# Altium PCB buoys_pcb_v2.PcbDoc
Units mm, origin at the board's own origin, x right, y up, seen from the top; angles counter-clockwise.
Board outline 65.02 x 44.32 mm, 2 copper layers (Top Layer, Bottom Layer); 41 components, 21 nets, 102 pads, 25 vias.
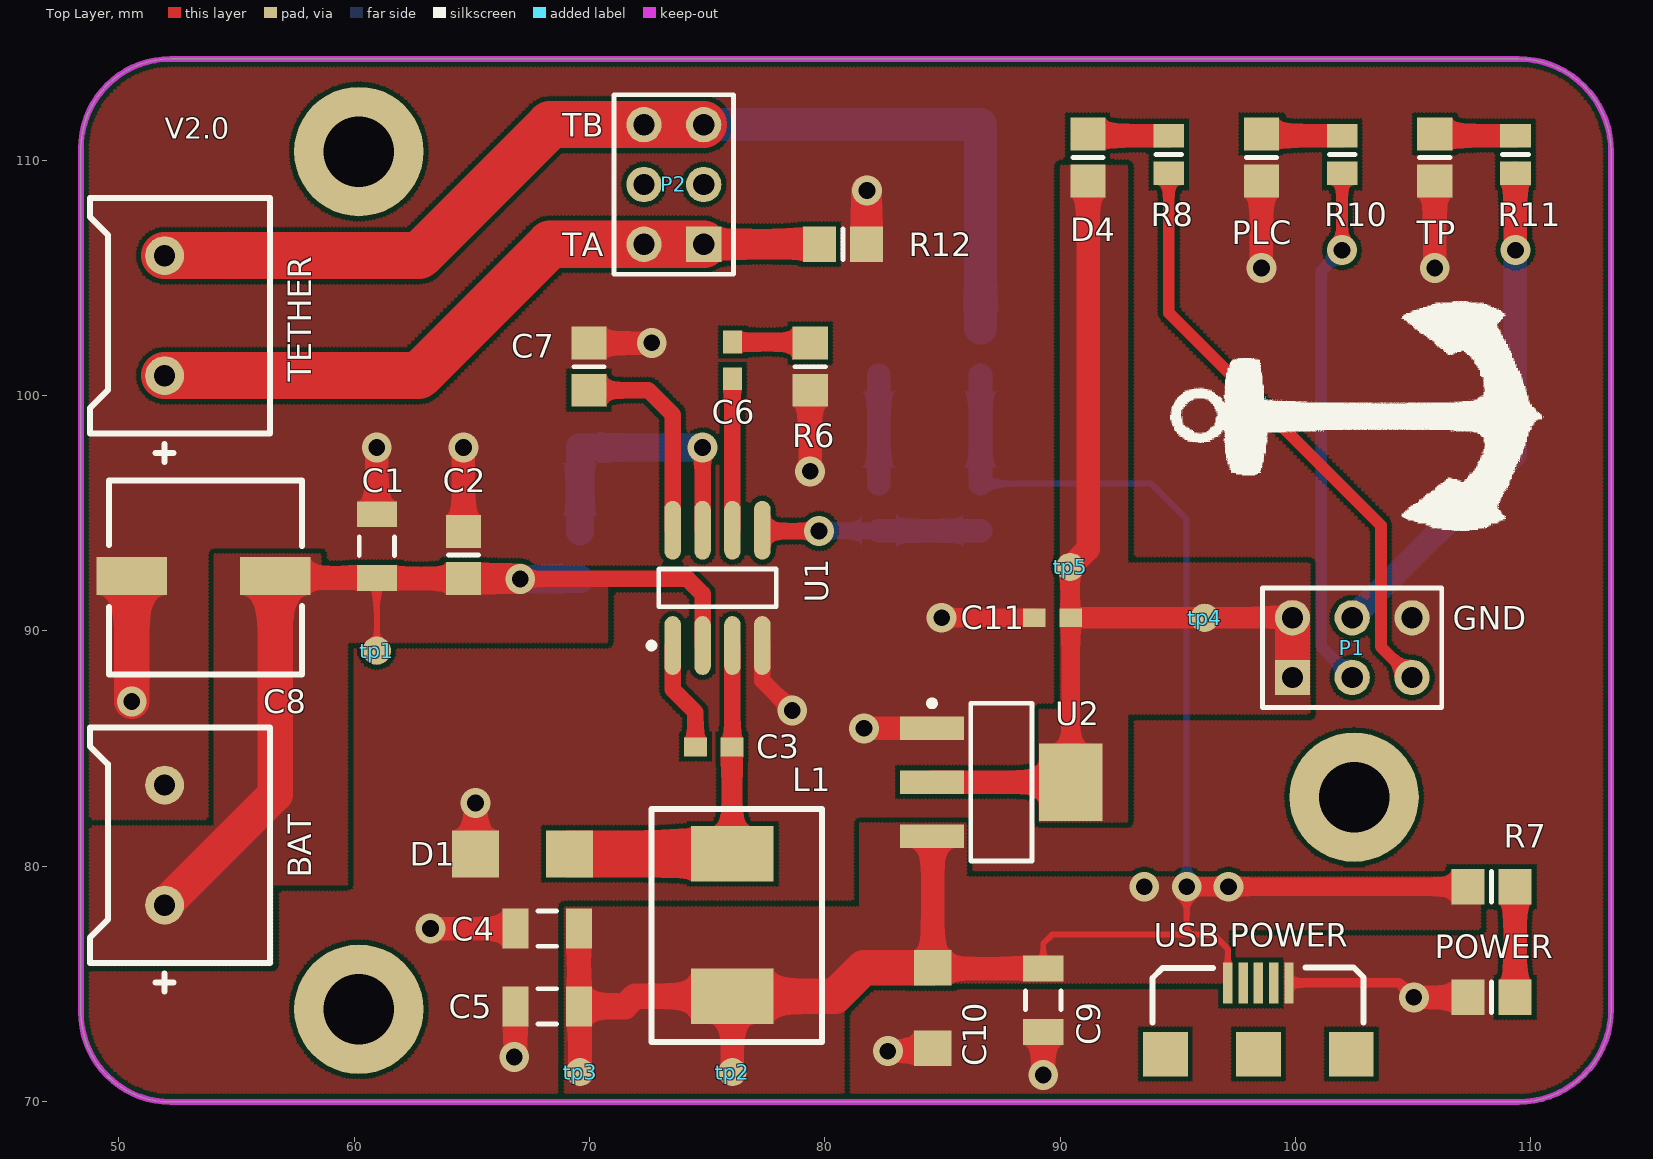
[diagram p0: Top Layer view]
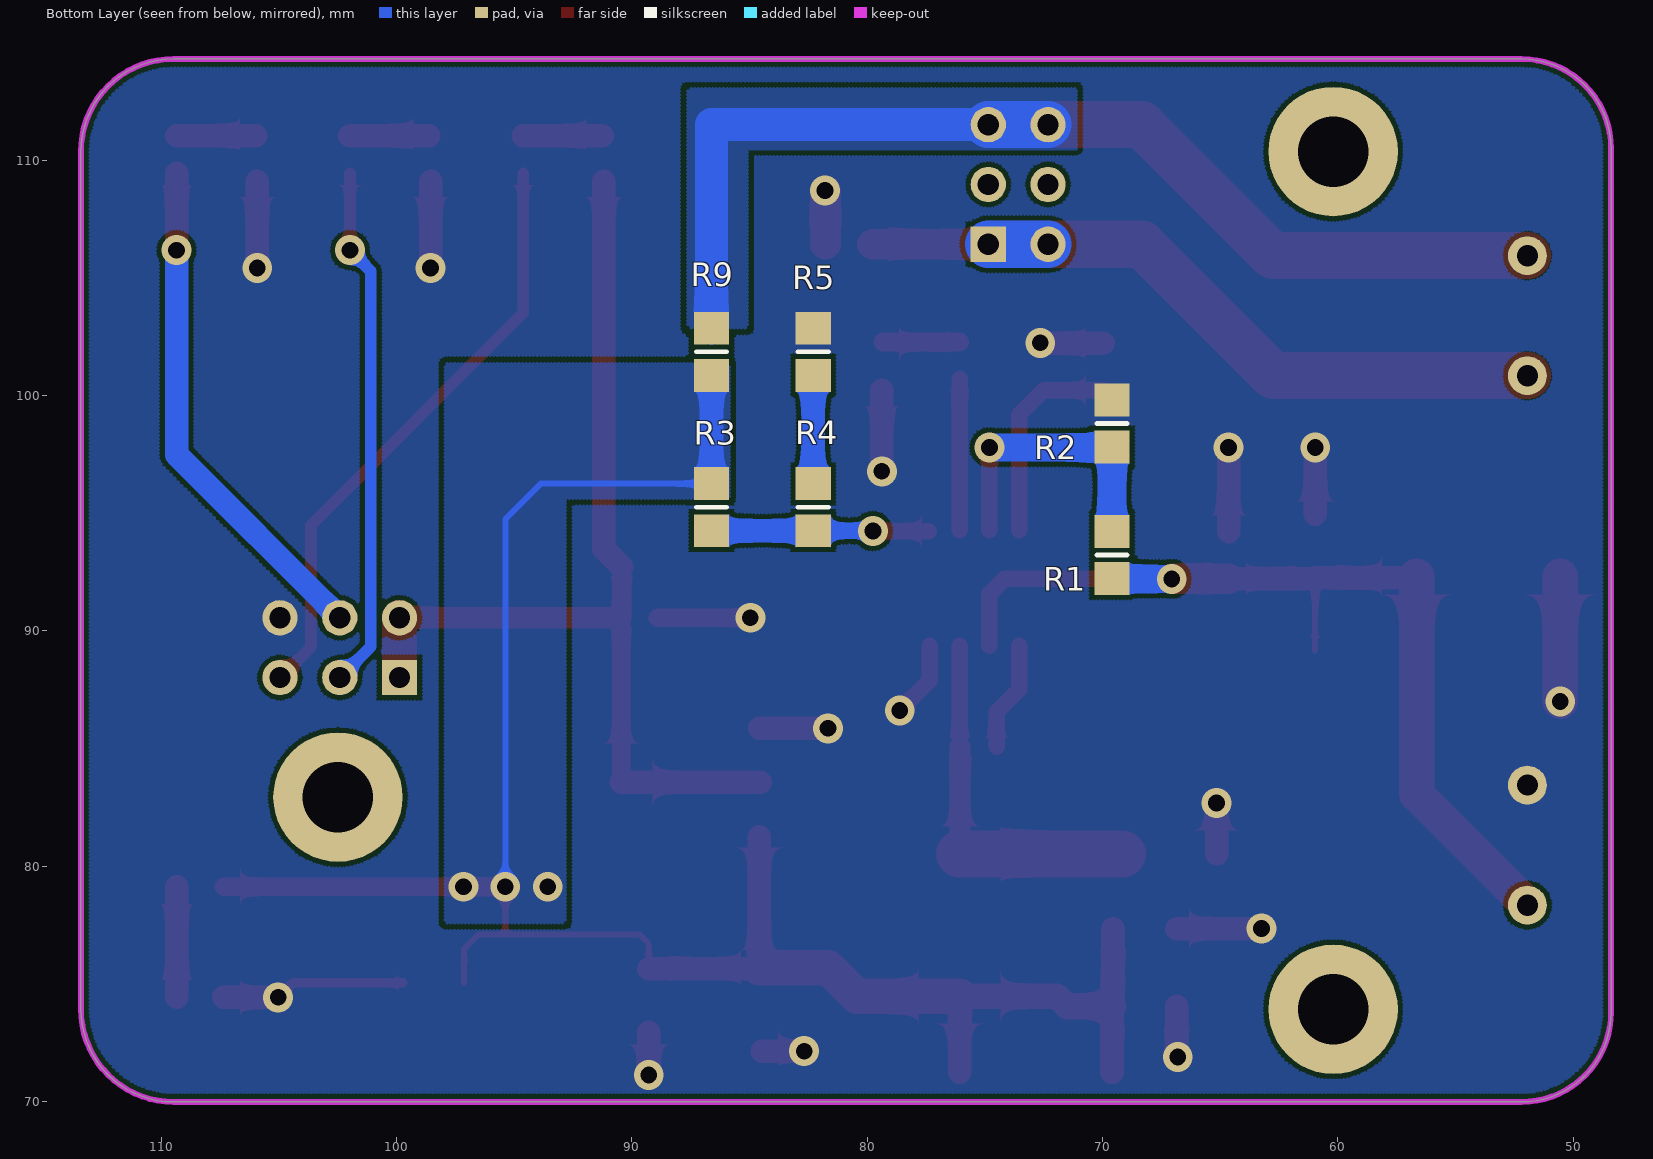
[diagram p1: Bottom Layer view, seen from below]

## Layer stack, top to bottom
Top Solder: solder mask 0.0102, Solder Resist, Dk 3.5
Top Layer: signal copper 0.0356
Dielectric 1: dielectric 0.32, FR-4, Dk 4.8
Bottom Layer: signal copper 0.0356
Bottom Solder: solder mask 0.0102, Solder Resist, Dk 3.5

## Board outline
48.387,73.787 48.387,110.49 cw(c52.197,110.49) 52.197,114.3 109.474,114.3 cw(c109.474,110.363) 113.411,110.363 113.411,73.914 cw(c109.474,73.914) 109.474,69.977 52.197,69.977 cw(c52.197,73.787)

## Design rules (kind name [scope] priority, off if disabled: settings)
Clearance [All] p1: gap=0.2
PolygonConnect [All] p1: connectstyle=Direct reliefconductorwidth=0.254 reliefentries=4 polygonreliefangle="90 Angle" airgapwidth=0.254
RoutingVias [All] p1: holewidth=0.711 width=1.27 viastyle="Through Hole" minholewidth=0.711 minwidth=1.27 maxholewidth=0.711 maxwidth=1.27
SolderMaskExpansion [All] p1: expansion=0.102
Width [All] p1: maxlimit=2 minlimit=0.254 preferedwidth=0.254
30 further rules are at their usual default settings.

## Components (designator, comment, footprint, x,y, rotation, side; value= is the part's Value field where it differs from the comment)
BAT "Header 2" ConnectorBlue 51.943,83.439 r270 top locked
C1 "Cap" C1206 60.96,93.599 r270 top
C2 "Cap" 6-0805_M 64.643,93.218 r270 top
C3 "Cap" 0603 75.946,84.963 r180 top
C4 "Cap" C1206 68.203,77.343 r0 top
C5 "Cap" C1206 68.203,74.041 r0 top
C6 "Cap" 0603 76.173,102.156 r270 top
C7 "Cap" 6-0805_M 69.977,101.219 r270 top
C8 "Cap Pol1" 220UF-35V 56.642,92.329 r180 top locked
C9 "Cap Pol2" C1206 89.281,74.295 r270 top
C10 "Cap Pol2" 1206 84.612,75.733 r270 top
C11 "Cap Pol2" 0603 90.345,90.451 r180 top
D1 "1n5824" 1n5824_1 65.151,80.518 r0 top
D4 "ORANGE" 6-0805_M 91.186,110.109 r90 top
L1 "Inductor" 0630 76.073,80.518 r270 top
P1 "Header 3X2" HDR2X3 99.871,88.011 r0 top locked
P2 "Header 3X2" HDR2X3 74.852,106.424 r90 top locked
PLC "RED" 6-0805_M 98.552,110.109 r270 top
POWER "RED POWER" 6-0805_M 108.331,74.422 r180 top
R1 "Res2" 6-0805_M 69.596,93.218 r270 bottom
R2 "Res2" 6-0805_M 69.596,98.806 r270 bottom
R3 "Res2" 6-0805_M 86.614,95.25 r270 bottom
R4 "Res2" 6-0805_M 82.296,95.25 r270 bottom
R5 "Res2" 6-0805_M 82.296,101.854 r270 bottom
R6 "Res2" 6-0805_M 79.375,101.219 r90 top
R7 "Res1" 6-0805_M 108.331,79.121 r180 top
R8 "Res1" 6-0805_L 94.615,110.236 r270 top
R9 "Res2" 6-0805_M 86.614,101.854 r270 bottom
R10 "Res1" 6-0805_L 101.981,110.236 r270 top
R11 "Res1" 6-0805_L 109.347,110.236 r270 top
R12 "Res2" 6-0805_M 80.772,106.426 r180 top
TETHER "Header 2" ConnectorBlue 51.943,105.938 r270 top locked
TP "BLUE" 6-0805_M 105.918,110.109 r270 top
tp1 "testpoint" tp 60.96,89.154 r0 top
tp2 "testpoint" tp 76.073,71.247 r0 top
tp3 "tp" testpoint 69.596,71.247 r0 top
tp4 "testpoint" tp 96.139,90.551 r0 top
tp5 "testpoint" tp 90.424,92.71 r0 top
U1 "MP1593DN" SO8_M 75.438,91.821 r90 top
U2 "AMS1117-3.3" SOT223_M 87.503,83.566 r0 top
"USB POWER" "microUSB" microUSB 97.125,75.034 r0 top locked

## Footprints (in the part's own frame and the unit in brackets; to place one, negate y for a bottom-side part, rotate by r counter-clockwise, add the part's x,y. Pads: shape width x height; smd on the part's side, far side on the other; paste and mask are expansions set on the pad)
1n5824_1 [mm]
  rect 2x2 smd: 1(0,0) 2(4,0)
6-0805_L [mm] "Chip Resistor, Body 2.0x1.2mm, IPC High Density"
  rect 1x1.3 smd: 1(-0.8,0) 2(0.8,0)
  silkscreen extent 0,-0.55 0,0.55, body extent -1.07,-0.7 1.07,0.7, height 0.7
6-0805_M [mm] "Chip Resistor, Body 2.0x1.2mm, IPC Low Density"
  rect 1.4x1.5 smd: 1(-1,0) 2(1,0)
  silkscreen extent 0,-0.65 0,0.65, body extent -1.07,-0.7 1.07,0.7, height 0.7
220UF-35V [mm]
  rect 3x1.6 smd: 1(0,0) 2(6.096,0)
  silkscreen extent -1.14,-4.06 7.06,4.19
0603 [mm]
  rect 0.965x0.8 smd: 1(-0.11,-0.1) 2(1.445,-0.1)
0630 [mm]
  rect 2.35x3.5 smd: 1(0,0) 2(6.05,0)
  silkscreen extent -1.91,-3.43 8,3.81
1206 [mm]
  rect 1.52x1.6 smd: 1(0.05,-0.03) 2(3.47,-0.03)
C1206 [mm] "Chip Capacitor, Body 3.2x1.6mm, IPC High Density"
  rect 1.1x1.7 smd: 1(-1.35,0) 2(1.35,0)
  silkscreen extent -0.4,-0.75 0.4,0.75, body extent -1.7,-0.9 1.7,0.9, height 1.3
ConnectorBlue [mm]
  round 1.65 hole 0.9: 1(0,0) 2(5.1,0)
  silkscreen extent -2.45,-3.18 8.76,4.48
HDR2X3 [mm] "Connector; Header; 3x2 Position"
  rect 1.5x1.5 hole 0.9: 1(0,0)
  round 1.5 hole 0.9: 2(0,2.54) 3(2.54,0) 4(2.54,2.54) 5(5.08,0) 6(5.08,2.54)
  silkscreen extent -1.27,-1.27 6.35,3.81
microUSB [mm]
  rect 0.4x1.75 smd: 1(0,0) 2(0.65,0) 3(1.3,0) 4(1.95,0) 5(2.6,0)
  rect 1.9x1.9 smd: 6(-2.65,-3.025) 7(1.3,-3.025) 8(5.25,-3.025)
  silkscreen extent -3.2,-1.68 5.77,0.66
SO8_M [mm] "SOIC, 8-Leads, Body 4.9x3.9mm, Pitch 1.27mm, IPC Low Density"
  oval 2.5x0.7 smd: 1(-2.45,1.905) 2(-2.45,0.635) 3(-2.45,-0.635) 4(-2.45,-1.905) 5(2.45,-1.905) 6(2.45,-0.635) 7(2.45,0.635) 8(2.45,1.905)
  silkscreen extent -2.57,-2.5 0.8,2.93, body extent -2,-2.5 2,2.5, height 1.75
SOT223_M [mm] "SOT223, 4-Leads, Body 6.5x3.5mm, Pitch 2.3mm, Lead Span 7mm, IPC Low Density"
  rect 2.7x1 smd: 1(-2.95,2.3) 2(-2.95,0) 3(-2.95,-2.3)
  rect 2.7x3.3 smd: 4(2.95,0)
  silkscreen extent -3.07,-3.35 1.3,3.47, body extent -1.85,-3.35 1.85,3.35, height 1.7
testpoint [mm]
  round 1.2 smd: 1(0,0)
tp [mm]
  round 1.2 smd: 1(0,0)

## Part data
BAT TETHER: "Header, 2-Pin"
C1 C2 C3 C4 C5 C6 C7: "Capacitor"
C8: "Polarized Capacitor (Radial)"
C9 C10 C11: "Polarized Capacitor (Axial)"
D1: library part Diode, "Default Diode"
D4 PLC POWER TP: library part LED2, "Typical RED, GREEN, YELLOW, AMBER GaAs LED"
P1 P2: "Header, 3-Pin, Dual row"
R1 R2 R3 R4 R5 R6 R7 R8 R9 R10 R11 R12: "Resistor"
U2: library part Component_3
"USB POWER": library part Component_1

## Free pads (board coordinates)
  round 5.5 hole 3: 0(60.198,110.363) 1(60.198,73.914) 2(102.489,82.931)

## Via types
v1: diameter 1.27, hole 0.711, Top Layer to Bottom Layer, 25 vias

## Nets (pads, with @x,y where several pads share a name; then routed paths per layer and width w, separated by ;. In a path a pad name is that pad's centre, name@x,y a point inside that pad or via, vN(x,y) a via of type N, cw(c..) or ccw(c..) an arc to the next point about the centre after c; other vN are vias at no path point)
+5V: "USB POWER.1" C4.2 C5.2 C9.1 C10.1 L1.2 R3.1 R7.2 R9.2 tp2.1 tp3.1 U2.3 | length 89.7
  Top Layer w0.254: C5.2 C5.2@69.596,73.998 ; U2.3 U2.3@84.582,81.237 ; C10.1 C10.1@84.62,75.645 ; C9.1@89.192,75.683 89.281,75.772 89.281,76.708 89.662,77.089 95.377,77.089 ; v1(95.377,79.121) 95.377,77.089 ; 97.125,75.034 97.125,76.484 96.52,77.089 95.377,77.089
  Top Layer w0.8: v1(95.377,79.121) v1(97.155,79.121) R7.2
  Top Layer w1: C5.2 C4.2 ; tp3.1 C5.2@69.596,73.998 ; tp2.1 L1.2 ; C10.1 U2.3@84.582,81.237 ; C10.1@84.62,75.645 C9.1
  Top Layer w1.1: C5.2 71.501,74.041 71.928,74.468 L1.2
  Top Layer w1.5: L1.2 80.437,74.468 81.652,75.683 C10.1
  Bottom Layer w0.254: R3.1 93.869,96.25 95.377,94.742 v1(95.377,79.121)
  Bottom Layer w1: R3.1 R9.2
  other v1: 93.574,79.121
+V3.3: C11.1 D4.1 P1.1 P1.2 tp4.1 tp5.1 U2.2 U2.4 | length 43.7
  Top Layer w0.254: C11.1@90.424,90.582 C11.1 C11.1@90.453,90.549
  Top Layer w0.8: C11.1@90.424,90.582 tp5.1 ; U2.4 C11.1@90.453,90.549
  Top Layer w0.9: C11.1 tp4.1 P1.2
  Top Layer w1: U2.2 U2.4 ; tp5.1 91.186,93.472 D4.1
  Top Layer w1.5: P1.1 P1.2
GND: "USB POWER.5" BAT.1 C1.1 C2.1 C4.1 C5.1 C7.1 C8.2 C9.2 C10.2 C11.2 D1.1 P1.6 PLC.2 POWER.2 R2.1 R5.1 R6.1 R12.1 TP.2 U1.4 U2.1 | length 57.3
  Top Layer w0.254: v1(66.802,71.882) v1@66.853,71.933 ; v1@72.628,102.219 v1(72.644,102.235) ; v1(81.661,85.852) v1@81.675,85.866 ; v1@81.772,108.696 v1(81.788,108.712) ; C10.2@84.455,72.136 C10.2
  Top Layer w0.4: 99.725,75.034 104.417,75.034 v1(105.029,74.422)
  Top Layer w0.7: U1.4 77.343,87.884 v1(78.613,86.614)
  Top Layer w0.8: v1(84.963,90.551) C11.2
  Top Layer w1: C1.1 v1(60.96,97.79) ; v1(63.246,77.343) C4.1 ; C2.1 v1(64.643,97.79) ; D1.1 v1(65.151,82.677) ; v1@66.853,71.933 C5.1 ; C7.1 v1@72.628,102.219 ; v1(79.375,96.774) R6.1 ; v1@81.675,85.866 U2.1 ; v1(82.677,72.136) C10.2@84.455,72.136 ; v1(89.281,71.12) C9.2 ; v1(98.552,105.41) PLC.2 ; v1(105.029,74.422) POWER.2 ; v1(105.918,105.41) TP.2
  Top Layer w1.3: R12.1 v1@81.772,108.696
  Top Layer w1.5: v1(50.546,86.995) C8.2
NetC3_1: C3.1 D1.2 L1.1 U1.3 | length 15.8
  Top Layer w0.254: L1.1@76.056,80.535 L1.1 ; C3.1 C3.1@76.073,85.08
  Top Layer w0.7: C3.1@76.073,85.08 U1.3
  Top Layer w0.9: L1.1@76.056,80.535 C3.1
  Top Layer w2: D1.2 L1.1
NetC3_2: C3.2 U1.1 | length 4.7
  Top Layer w0.7: U1.1 73.533,87.503 74.501,86.535 C3.2
NetC6_1: C6.1 R6.2 | length 3.3
  Top Layer w0.254: R6.2@79.328,102.266 R6.2
  Top Layer w0.8: C6.1 R6.2@79.328,102.266
NetC6_2: C6.2 U1.6 | length 6.4
  Top Layer w0.7: U1.6 C6.2
NetC7_2: C7.2 U1.8 | length 8.9
  Top Layer w0.7: C7.2 72.501,100.219 73.533,99.187 U1.8
NetD4_2: D4.2 R8.1 | length 3.5
  Top Layer w0.254: D4.2 D4.2@91.259,111.036
  Top Layer w1: D4.2@91.259,111.036 R8.1
NetP1_5: P1.5 R8.2 | length 25.7
  Top Layer w0.5: R8.2 94.615,103.505 103.632,94.488 103.632,89.33 P1.5
NetPLC_1: PLC.1 R10.1 | length 3.5
  Top Layer w0.254: PLC.1 PLC.1@98.625,111.036
  Top Layer w1: PLC.1@98.625,111.036 R10.1
NetPOWER_1: POWER.1 R7.1 | length 4.7
  Top Layer w1: POWER.1 R7.1
NetR1_1: R1.1 R2.2 U1.7 | length 12.3
  Top Layer w0.7: U1.7 v1(74.803,97.79)
  Bottom Layer w0.254: R2.2 R2.2@69.612,97.79
  Bottom Layer w1.2: R1.1 R2.2 ; R2.2@69.612,97.79 v1(74.803,97.79)
NetR3_2: R3.2 R4.2 U1.5 | length 9.3
  Top Layer w0.254: U1.5 U1.5@77.38,94.234
  Top Layer w0.7: U1.5@77.38,94.234 v1(79.756,94.234)
  Bottom Layer w0.254: v1(79.756,94.234) v1@79.772,94.25
  Bottom Layer w0.7: v1@79.772,94.25 R4.2
  Bottom Layer w1: R4.2 R3.2
NetR4_1: R4.1 R5.2 | length 4.6
  Bottom Layer w1: R4.1 R5.2
NetR11_1: R11.1 TP.1 | length 3.5
  Top Layer w0.254: TP.1 TP.1@105.991,111.036
  Top Layer w1: TP.1@105.991,111.036 R11.1
PLC: P1.3 R10.2 | length 22.3
  Top Layer w0.5: v1(101.981,106.172) R10.2
  Bottom Layer w0.5: v1(101.981,106.172) 101.092,105.283 101.092,89.33 P1.3
TETHERA: P2.1 P2.2 R12.2 TETHER.2 | length 32.7
  Top Layer w0.254: P2.1 P2.1@74.854,106.426
  Top Layer w1.3: P2.1@74.854,106.426 R12.2
  Top Layer w2: TETHER.2 62.738,100.838 68.324,106.424 P2.2 P2.1
  Bottom Layer w2: P2.2 P2.1
TETHERB: P2.5 P2.6 R9.1 TETHER.1 | length 48.2
  Top Layer w2: TETHER.1 62.758,105.938 68.324,111.504 P2.6 P2.5
  Bottom Layer w0.254: 86.612,105.285 86.614,105.283
  Bottom Layer w1.4: P2.5 86.612,111.504 86.612,105.285 ; R9.1 86.614,105.283
  Bottom Layer w2: P2.6 P2.5
TP: P1.4 R11.2 | length 21.9
  Top Layer w0.254: R11.2 R11.2@109.474,109.309
  Top Layer w1: v1(109.347,106.172) R11.2
  Bottom Layer w1: P1.4 109.347,97.487 v1(109.347,106.172)
VBAT: BAT.2 C1.2 C2.2 C8.1 R1.2 tp1.1 U1.2 | length 42.3
  Top Layer w0.254: C8.1 C8.1@56.722,92.249 ; tp1.1 C1.2 C1.2@60.991,92.218 ; v1@67.04,92.218 v1(67.056,92.202)
  Top Layer w0.7: v1(67.056,92.202) 74.168,92.202 74.803,91.567 U1.2
  Top Layer w1: C8.1@56.722,92.249 C1.2 ; C1.2@60.991,92.218 C2.2
  Top Layer w1.3: C2.2 v1@67.04,92.218
  Top Layer w1.5: BAT.2 56.642,83.038 C8.1
  Bottom Layer w0.254: R1.2@69.58,92.202 R1.2
  Bottom Layer w1.2: v1(67.056,92.202) R1.2@69.58,92.202
pads on no net: "USB POWER.2" "USB POWER.3" "USB POWER.4" "USB POWER.6" "USB POWER.7" "USB POWER.8" P2.3 P2.4

## Polygon pours and split planes (outlines as drawn)
GND on Top Layer "top_gnd" (hatched 90Degree grid 0 track 0.152, remove dead copper, pour order 24): 48.26,114.3 48.26,69.85 113.665,69.85 113.665,114.3 48.26,114.3
VBAT on Top Layer "vbat_top_1" (hatched 90Degree grid 0 track 0.152, remove dead copper, pour order 0): 54.991,93.218 54.102,93.218 54.102,81.661 48.387,81.661 48.387,75.819 56.515,75.819 56.515,79.248 59.69,79.248 59.69,89.535 70.739,89.535 70.739,92.075 65.024,92.075 58.547,92.075 58.547,93.218 54.991,93.218
+5V on Top Layer "5v_top_1" (hatched 90Degree grid 0 track 0.152, remove dead copper, pour order 2): 68.961,78.232 68.961,69.977 80.772,69.977 80.772,75.057 97.102,75.057 97.125,75.034 97.125,76.484 97.125,77.313 97.155,77.343 107.823,77.343 107.823,79.375 107.823,79.502 85.979,79.502 85.979,81.788 81.534,81.788 81.534,78.232 68.961,78.232
+V3.3 on Top Layer "3,.3v_top_1" (hatched 90Degree grid 0 track 0.152, remove dead copper, pour order 6): 90.043,93.218 90.043,109.728 92.837,109.728 92.837,92.837 100.584,92.837 100.584,86.487 92.837,86.487 92.837,81.915 89.154,81.915 89.154,86.614 90.043,86.614 90.043,93.218
GND on Bottom Layer "bottom_gnd" (hatched 90Degree grid 0 track 0.152, remove dead copper, pour order 22): 48.26,114.3 48.26,69.85 48.387,69.977 57.912,69.977 113.665,69.977 113.665,114.3 48.26,114.3
TETHERB on Bottom Layer "bottom_tetherb" (hatched 90Degree grid 0 track 0.152, remove dead copper, pour order 20): 71.12,113.03 87.63,113.03 87.63,102.87 85.09,102.87 85.09,110.49 81.026,110.49 71.12,110.49 71.12,113.03
+5V on Bottom Layer "5v_bottom_1" (hatched 90Degree grid 0 track 0.152, remove dead copper, pour order 4): 85.852,101.346 97.155,101.346 97.536,101.346 97.917,101.346 97.917,77.597 92.837,77.597 92.837,95.631 88.138,95.631 85.852,95.631 85.852,101.346

## Keep-outs
Keep-Out Layer:
  the board outline again, w0.254

## Silkscreen, mask and mechanical layers (free items; w line width, h text height)
Top Overlay:
  drawing of 8075 lines, arcs and shapes, not listed
  text "V2.0" at 51.943,110.617 h1.52

## Text inside footprints (layer, text, board x,y; h text height)
P1: Top Overlay "GND" at 106.68,90.043 h1
P2: Top Overlay "TA" at 68.834,105.918 h1; Top Overlay "TB" at 68.834,110.998 h1